# Altium PCB PCB2_Plata.PcbDoc
Units mm, origin at the board's own origin, x right, y up, seen from the top; angles counter-clockwise.
Board outline 55 x 30 mm, 2 copper layers (Top Layer, Bottom Layer), stack 1.57 mm thick; 46 components, 37 nets, 186 pads, 88 vias.
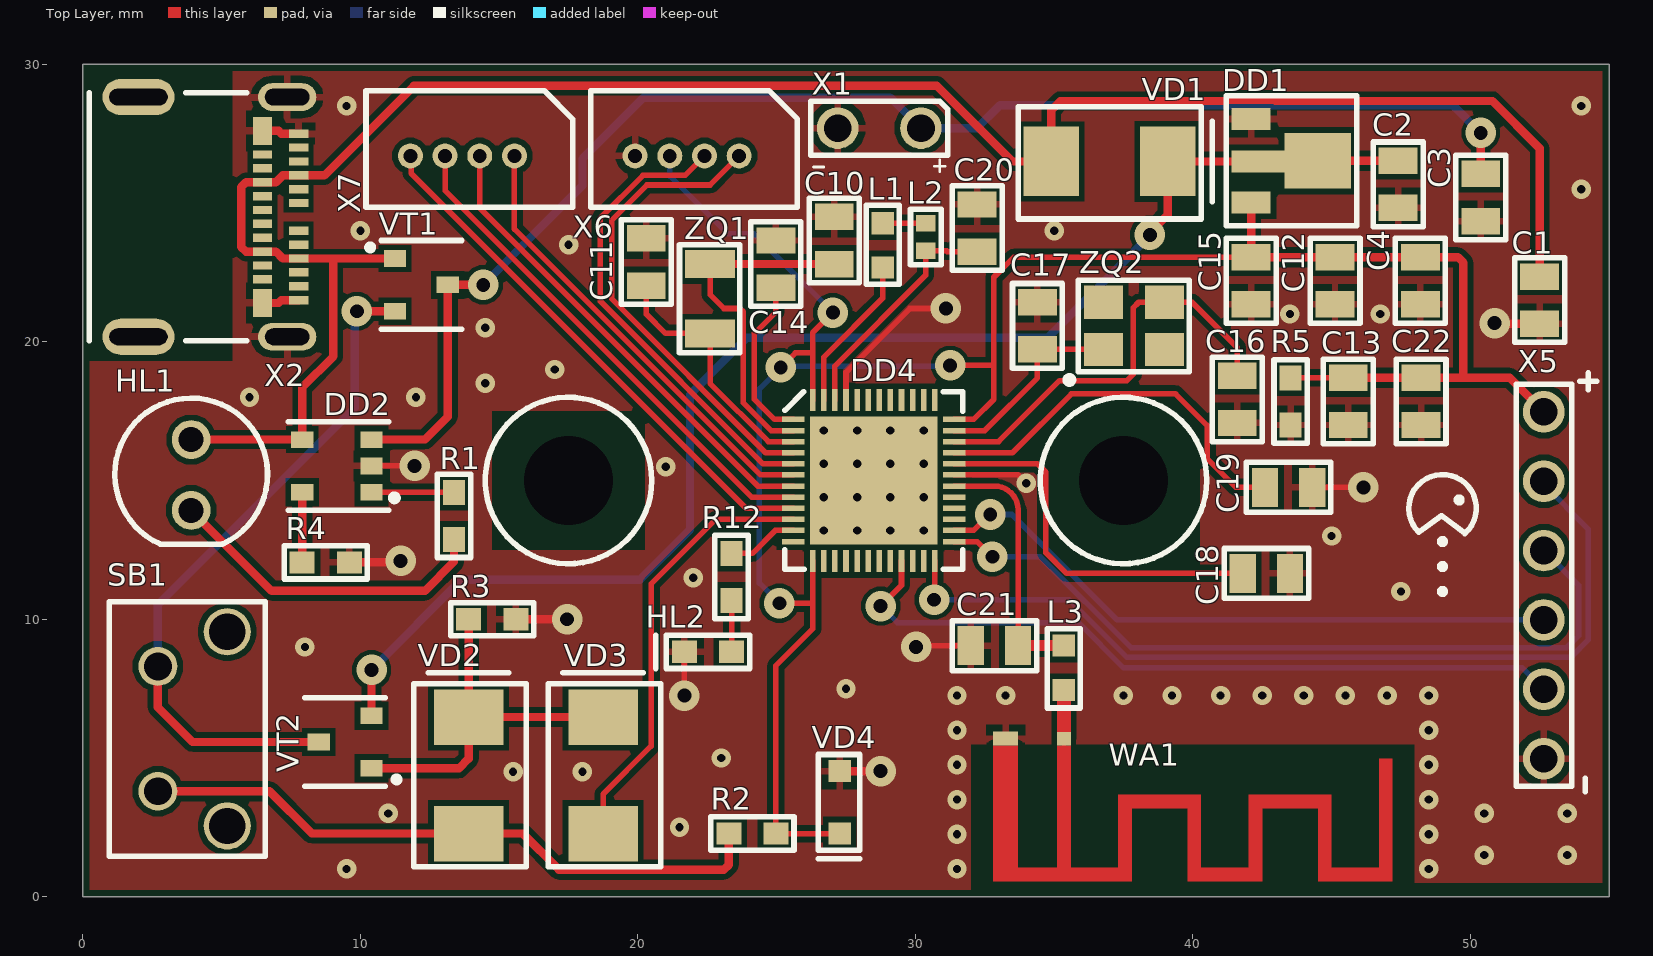
[diagram p0: Top Layer view]
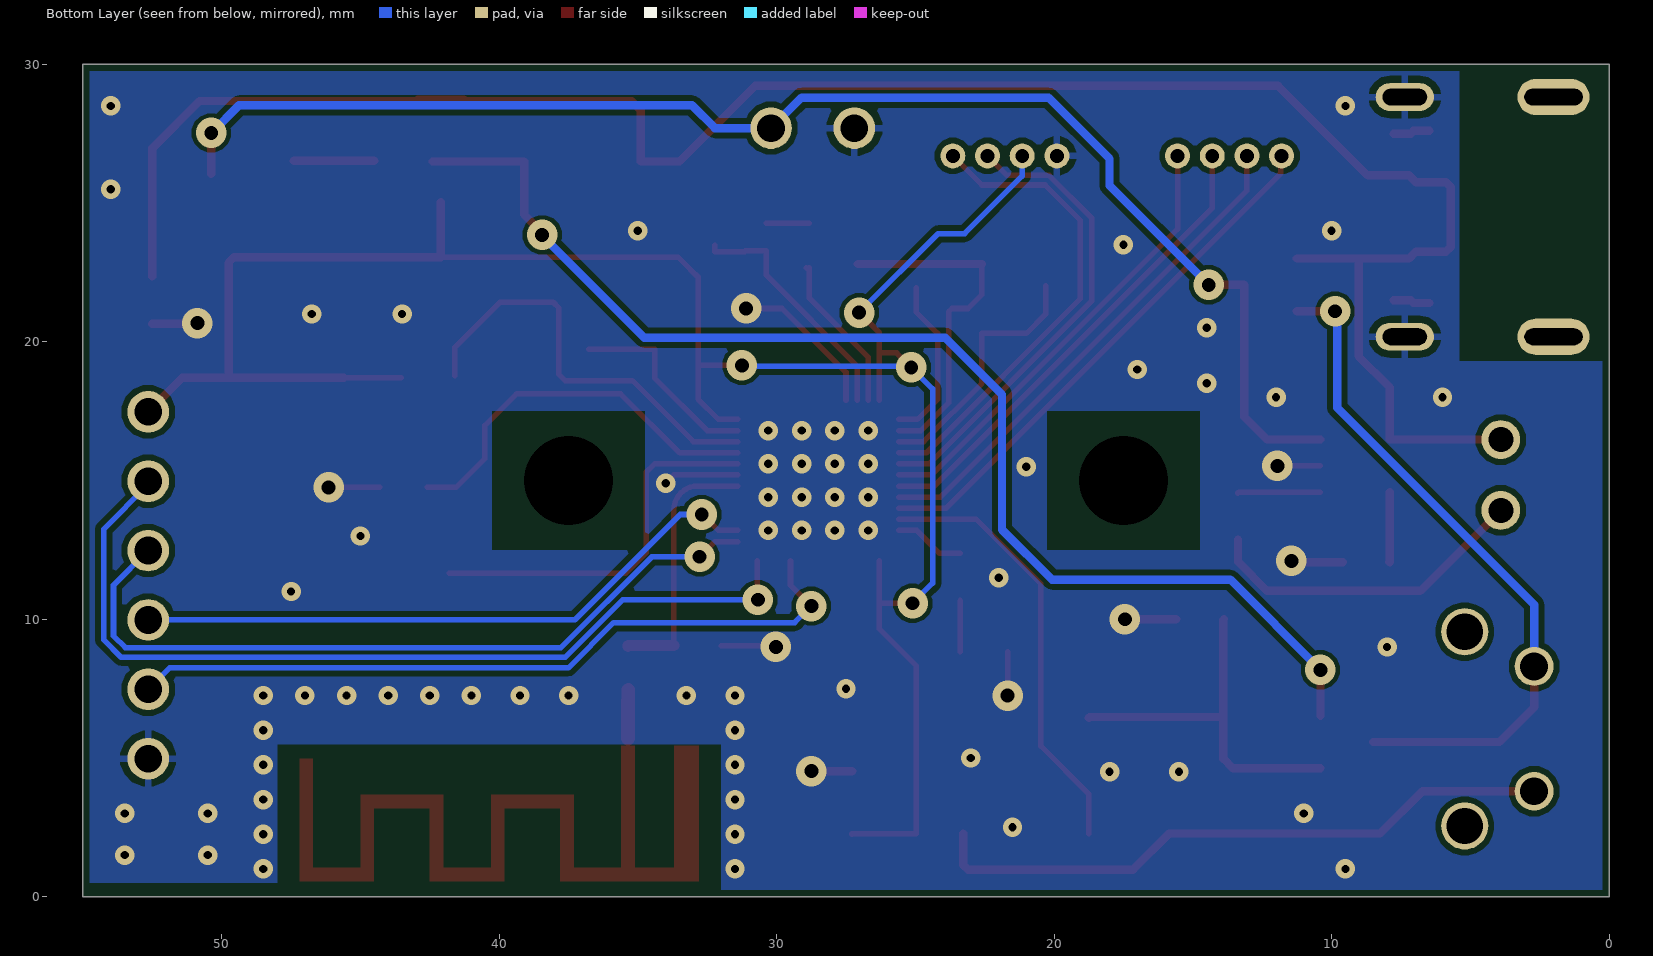
[diagram p1: Bottom Layer view, seen from below]
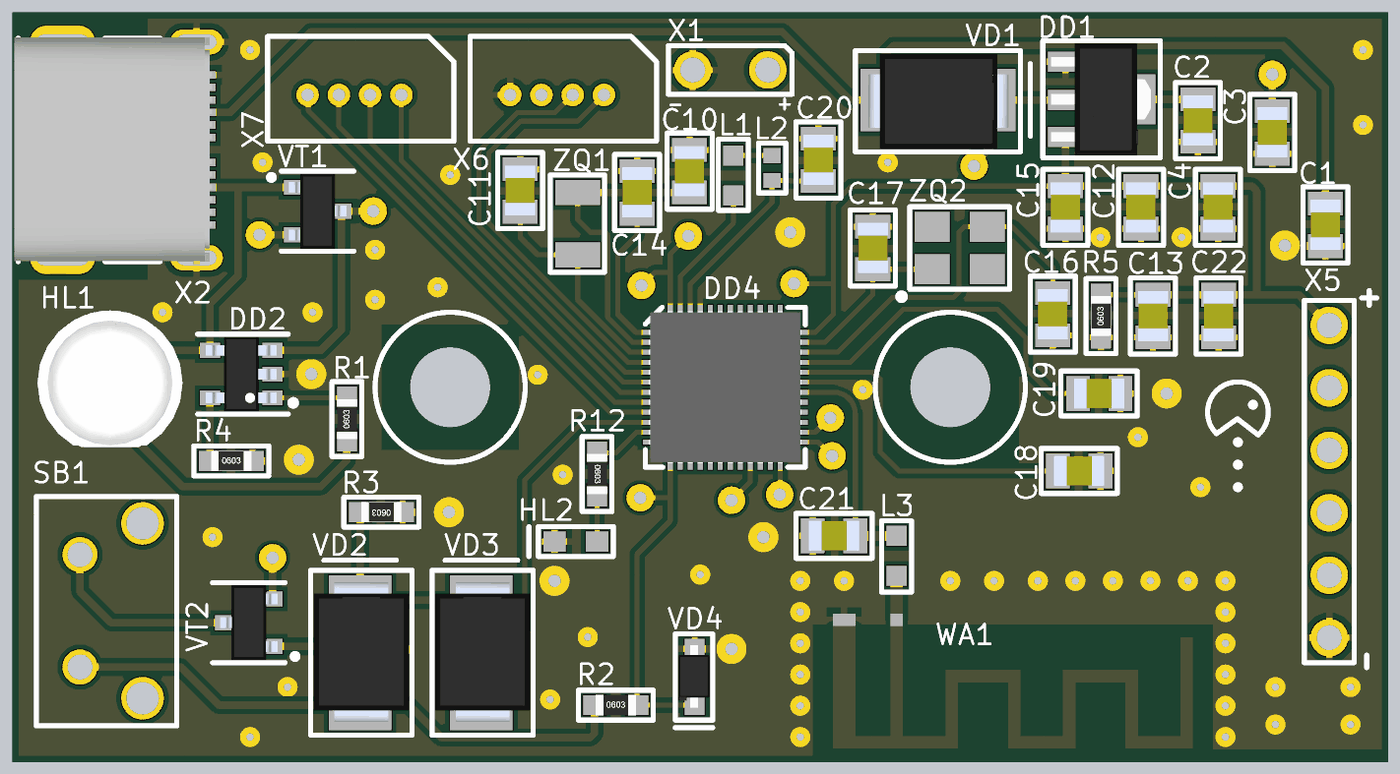
[diagram p2: 3D render of the assembled board from above, using the file's embedded part models]

## Layer stack, top to bottom
Top Solder: solder mask 0.01, Solder Resist, Dk 3.5
Top Layer: signal copper 0.035
Dielectric 1: dielectric 1.5, FR-4, Dk 4.8
Bottom Layer: signal copper 0.035
Bottom Solder: solder mask 0.01, Solder Resist, Dk 3.5

## Board outline
0,0 0,30 55,30 55,0

## Design rules (kind name [scope] priority, off if disabled: settings)
AcuteAngle [All] p1: minimum=6.00000000000000E+0001 checktracksonly=FALSE
Clearance Clearance_KeepOutLayer [OnLayer('Keep-Out Layer')] p1: gap=0.5 ignorepadtopadclearanceinfootprint=FALSE
Clearance [All] p2: gap=0.15 ignorepadtopadclearanceinfootprint=FALSE except(0.2: Track-Fill Track-Poly Track-Region SMDPad-Fill SMDPad-Poly SMDPad-Region THPad-Fill THPad-Poly THPad-Region Fill-Fill Fill-Poly Fill-Region Poly-Poly Poly-Region Region-Region)
ComponentClearance [All] p1: gap=0.2 collisioncheckmode=3 verticalgap=0.2 showdistances=FALSE
HoleSize [All] p1: absolutevalues=TRUE maxlimit=3.2 minlimit=0.3 maxpercent=80.000 minpercent=20.000
HoleToHoleClearance [All] p1: gap=0.2 allowstackedmicrovias=TRUE
MinimumAnnularRing [All] p1: minimumring=0.2
MinimumSolderMaskSliver [All] p1: minsoldermaskwidth=0.09
PolygonConnect PolygonConnect_Via [IsVia] p1: connectstyle=Direct reliefconductorwidth=0.254 reliefentries=4 polygonreliefangle="90 Angle" airgapwidth=0.254
PolygonConnect [All] p2: connectstyle=Relief reliefconductorwidth=0.25 reliefentries=4 polygonreliefangle="90 Angle" airgapwidth=0.25
RoutingVias [All] p1: holewidth=0.4 width=0.9 viastyle="Through Hole" minholewidth=0.3 minwidth=0.7 maxholewidth=0.5 maxwidth=1.1
SMDEntry [All] p1: side=TRUE corner=TRUE anyangle=FALSE
SMDNeckDown [All] p1: percent=100.000
SMDToCorner [All] p1: distance=0
SMDToPlane [All] p1: distance=0
SilkToSilkClearance [All] p1: silktosilkclearance=0
SilkToSolderMaskClearance [IsPad] p1: minsilkscreentomaskgap=0 clearancetoexposedcopper=FALSE
SolderMaskExpansion [All] p1: expansion=0.05 istentingtop=FALSE
Width [All] p1: maxlimit=5 minlimit=0.15 preferedwidth=0.25
24 further rules are at their usual default settings.

## Classes and differential pairs
component class Sheet3_mk: C10 C11 C12 C13 C14 C15 C16 C17 C18 C19 C20 C21 C22 DD4 HL2 L1 L2 L3 R12 WA1 X5 X6 X7 ZQ1 ZQ2
component class Sheet1: C1 C2 C3 C4 DD1 DD2 HL1 R1 R2 R3 R4 R5 SB1 VD1 VD2 VD3 VD4 VT1 VT2 X1 X2

## Components (designator, comment, footprint, x,y, rotation, side; value= is the part's Value field where it differs from the comment)
C1 "4.7 мкФ" CAP_0805 52.5,21.5 r270 top
C2 "1 мкФ" CAP_0805 47.4,25.675 r270 top
C3 "4.7 мкФ" CAP_0805 50.375,25.2 r90 top
C4 "1 мкФ" CAP_0805 48.2,22.2 r270 top
C10 "12 пФ" CAP_0805 27.075,23.65 r270 top
C11 "12 пФ" CAP_0805 20.3,22.875 r270 top
C12 "100 нФ" CAP_0805 45.125,22.2 r270 top
C13 "100 нФ" CAP_0805 45.6,17.85 r90 top
C14 "100 нФ" CAP_0805 24.975,22.8 r270 top
C15 "4.7 мкФ" CAP_0805 42.1,22.2 r270 top
C16 "12 пФ" CAP_0805 41.6,17.925 r270 top
C17 "12 пФ" CAP_0805 34.4,20.575 r90 top
C18 "100 пФ" CAP_0805 42.65,11.65 r0 top
C19 "100 пФ" CAP_0805 43.45,14.75 r0 top
C20 "1 мкФ" CAP_0805 32.225,24.1 r90 top
C21 "0.8 пФ" CAP_0805 32.85,9.05 r180 top
C22 "100 нФ" CAP_0805 48.225,17.85 r90 top
DD1 "XC6206P332RP" SOT-89 43.3,26.525 r270 top
DD2 "MCP73831T-2ATI/OT" SOT-23-5 10.4,14.575 r90 top
DD4 "nRF52832-QFAA" QFN48_6X6 28.5,15 r0 top
HL1 "L-57EGW" LED 3.9,15.2 r180 top
HL2 "TO-1608BC-PG" LED_0603 22.525,8.825 r180 top
L1 "10 мкГн" INDICT_0603 28.825,23.425 r90 top
L2 "15 нГн" INDICT_0402 30.375,23.775 r270 top
L3 "3.9 нГн" INDICT_0603 35.35,8.3 r270 top
R1 "470 Ом" RES_0603 13.375,13.725 r90 top
R2 "100 кОм" RES_0603 24.125,2.275 r0 top
R3 "100 кОм" RES_0603 14.75,10 r180 top
R4 "2 кОм" RES_0603 8.75,12.05 r0 top
R5 "1 МОм" RES_0603 43.525,17.85 r90 top
R12 "1 кОм" RES_0603 23.375,11.525 r270 top
SB1 "L-KLS7-TS6606" Button 3.95,6.05 r270 top
VD1 "10BQ100" SMB(DIODE) 37,26.5 r0 top
VD2 "10BQ100" SMB(DIODE) 13.9,4.375 r90 top
VD3 "10BQ100" SMB(DIODE) 18.75,4.375 r90 top
VD4 "MM3Z3V3B" SOD-323F 27.275,3.4 r90 top
VT1 "AO3401A" SOT-23-3 12.2,22.05 r270 top
VT2 "AO3400A" SOT-23-3 9.45,5.575 r90 top
WA1 "AN043" "BLE_50_Ohm_2400 MHz" 35.325,5.6 r90 top
X1 "LP803048" Raziem2_3mm 30.2,27.7 r180 top
X2 "105450-0101" USB-C 4,24.5 r270 top
X5 "JTAG" RAZIEM_6_2.54mm 52.65,17.475 r270 top
X6 "SCT1251WV-4P" Raziem4(1)_1.25mm 22.4,26.7 r180 top
X7 "SCT1251WV-4P" Raziem4(1)_1.25mm 14.3,26.7 r180 top
ZQ1 "32.768 кГц" QUARTZ(32.768) 22.6,20.3 r90 top
ZQ2 "32 МГц" QUARTZ(32) 37.875,20.575 r0 top

## Footprints (in the part's own frame and the unit in brackets; to place one, negate y for a bottom-side part, rotate by r counter-clockwise, add the part's x,y. Pads: shape width x height; smd on the part's side, far side on the other; paste and mask are expansions set on the pad)
"BLE_50_Ohm_2400 MHz" [mm]
  rect 0.5x0.5 smd mask+0.05: 1(0.094,-0.028)
  rect 0.5x0.9 smd paste+0 mask+0.05: 2(0.096,2.072)
  Top Layer region: -5.056,1.622 -0.148,1.622 -0.148,2.522 -5.056,2.522
  Top Layer region: -5.056,-2.477 -4.556,-2.477 -4.556,2.523 -5.056,2.523
  Top Layer region: -5.056,-2.477 -1.916,-2.477 -1.916,-1.977 -5.056,-1.977
  Top Layer region: -4.756,-0.278 -0.152,-0.278 -0.152,0.222 -4.756,0.222
  Top Layer region: -2.416,-4.539 -1.916,-4.539 -1.916,-2.163 -2.416,-2.163
  Top Layer region: -4.662,-4.978 -1.916,-4.978 -1.916,-4.478 -4.662,-4.478
  Top Layer region: -5.056,-7.177 -4.556,-7.177 -4.556,-4.477 -5.056,-4.477
  Top Layer region: -4.686,-7.177 -1.916,-7.177 -1.916,-6.677 -4.686,-6.677
  Top Layer region: -2.416,-9.303 -1.916,-9.303 -1.916,-7.145 -2.416,-7.145
  Top Layer region: -4.634,-9.678 -1.916,-9.678 -1.916,-9.178 -4.634,-9.178
  Top Layer region: -5.057,-11.878 -4.557,-11.878 -4.557,-9.178 -5.057,-9.178
  Top Layer region: -4.877,-11.878 -0.616,-11.878 -0.616,-11.378 -4.877,-11.378
Button [mm]
  round 1.7 hole 1.3: 0(-3.5,1.25) 0(3.5,1.25)
  round 1.4 hole 1: 1(-2.25,-1.25) 2(2.25,-1.25)
  silkscreen extent -4.57,-3 4.6,2.63, body extent -3.75,-2.88 3.75,2.54, height 8.1
CAP_0805 [mm]
  rect 0.95x1.4 smd: 1(-0.85,0) 2(0.85,0)
  silkscreen extent -1.53,-0.9 1.53,0.9, body extent -1,-0.6 1,0.6, height 0.9
INDICT_0402 [mm]
  rect 0.6x0.7 smd: 1(-0.5,0) 2(0.5,0)
  silkscreen extent -1,-0.55 1,0.55, body extent -0.5,-0.25 0.5,0.25, height 0.5
INDICT_0603 [mm]
  rect 0.8x0.8 smd: 1(-0.75,0) 2(0.85,0)
  silkscreen extent -1.35,-0.6 1.5,0.6, body extent -0.7,-0.35 0.77,0.33, height 0.6
LED [mm]
  round 1.4 hole 0.9: A(0,-1.275) K(0,1.275)
  silkscreen extent -2.75,-2.77 2.75,2.5, body extent -2.9,-2.86 2.9,2.53, height 13.1
LED_0603 [mm]
  rect 0.9x0.8 smd: A(-0.85,0) K(0.85,0)
  silkscreen extent -1.5,-0.6 1.88,0.6, body extent -0.8,-0.41 0.8,0.41, height 0.4
QFN48_6X6 [mm]
  rect 4.6x4.6 smd: 0(0,0)
  rect 0.8x0.2 smd: 1(-2.9,2.2) 2(-2.9,1.8) 3(-2.9,1.4) 4(-2.9,1) 5(-2.9,0.6) 6(-2.9,0.2) 7(-2.9,-0.2) 8(-2.9,-0.6) 9(-2.9,-1) 10(-2.9,-1.4) 11(-2.9,-1.8) 12(-2.9,-2.2) 25(2.9,-2.2) 27(2.9,-1.4) 28(2.9,-1) 29(2.9,-0.6) 30(2.9,-0.2) 31(2.9,0.2) 32(2.9,0.6) 33(2.9,1) 34(2.9,1.4) 35(2.9,1.8) 36(2.9,2.2)
  rect 0.2x0.8 smd: 13(-2.2,-2.9) 14(-1.8,-2.9) 15(-1.4,-2.9) 16(-1,-2.9) 17(-0.6,-2.9) 18(-0.2,-2.9) 19(0.2,-2.9) 20(0.6,-2.9) 21(1,-2.9) 22(1.4,-2.9) 23(1.8,-2.9) 24(2.2,-2.9) 37(2.2,2.9) 38(1.8,2.9) 39(1.4,2.9) 40(1,2.9) 41(0.6,2.9) 42(0.2,2.9) 43(-0.2,2.9) 44(-0.6,2.9) 45(-1,2.9) 46(-1.4,2.9) 47(-1.8,2.9) 48(-2.2,2.9)
  rect 0.8x0.2 smd paste+0: 26(2.9,-1.8)
  silkscreen extent -3.2,-3.2 3.2,3.2, body extent -3.05,-3.05 3.05,3.05, height 0.9
QUARTZ(32) [mm]
  rect 1.4x1.2 smd: 1(-1.1,-0.85) 2(1.1,0.85) 3(1.1,-0.85) 4(-1.1,0.85)
  silkscreen extent -2.45,-2.07 2,1.65, body extent -1.67,-1.34 1.68,1.34, height 0.8
QUARTZ(32.768) [mm]
  rect 1x1.8 smd: 1(0,0) 2(2.5,0)
  silkscreen extent -0.7,-1.07 3.2,1.1, body extent -0.4,-0.85 2.93,0.82, height 1
Raziem2_3mm [mm]
  round 1.5 hole 1: 1(0,0) 2(3,0)
  silkscreen extent -0.97,-0.97 3.98,1.58
Raziem4(1)_1.25mm [mm]
  round 0.9 hole 0.5: 1(-1.25,0) 2(0,0) 3(1.25,0) 4(2.5,0)
  silkscreen extent -3.35,-2.35 4.1,1.85, body extent -2.75,-1.75 4,1.75, height 4.7
RAZIEM_6_2.54mm [mm]
  round 1.5 hole 1: 1(0,0) 2(2.5,0) 3(5,0) 4(7.5,0) 5(10,0) 6(12.5,0)
  silkscreen extent -1.4,-1 13.7,1.9
RES_0603 [mm]
  rect 0.9x0.8 smd: 1(-0.85,0) 2(0.85,0)
  silkscreen extent -1.5,-0.6 1.5,0.6, body extent -0.8,-0.41 0.8,0.41, height 0.45
SMB(DIODE) [mm]
  rect 2x2.5 smd: A(-2.1,0) K(2.1,0)
  silkscreen extent -3.3,-2.07 3.7,1.97, body extent -2.78,-1.95 2.82,1.85, height 2.4
SOD-323F [mm]
  rect 0.8x0.8 smd: A(1.125,0) K(-1.125,0)
  silkscreen extent -2.02,-0.72 1.73,0.77, body extent -1.22,-0.6 1.28,0.65, height 0.72
SOT-23-3 [mm]
  rect 0.6x0.8 smd: DRAIN(0,0.95) GATE(-0.95,-0.95) SOURCE(0.95,-0.95)
  silkscreen extent -1.6,-1.94 1.6,1.45, body extent -1.5,-1.15 1.5,1.15, height 1.1
SOT-23-5 [mm]
  rect 0.6x0.8 smd: 1(0,0) 2(0.95,0) 3(1.9,0) 4(1.9,2.5) 5(0,2.5)
  silkscreen extent -0.65,-0.93 2.55,3, body extent -0.55,-0.17 2.45,2.67, height 1.1
SOT-89 [mm]
  rect 0.8x1.4 smd: 1(-1.5,-1.2) 3(1.5,-1.2)
  rect 2x2.4 smd: 2(0,1.2)
  rect 0.8x2 smd: 2(0.025,-0.9)
  silkscreen extent -2.35,-2.1 2.35,2.6, body extent -2.25,-1.77 2.25,2.23, height 1.53
USB-C [mm]
  rect 0.3x0.7 smd: A1(-3,3.77) A2(-2.5,3.77) A3(-2,3.77) A4(-1.5,3.77) A5(-1,3.77) A6(-0.5,3.77) A7(0.5,3.77) A8(1,3.77) A9(1.5,3.77) A10(2,3.77) A11(2.5,3.77) A12(3,3.77) B2(2.25,2.47) B3(1.75,2.47) B4(1.25,2.47) B5(0.75,2.47) B6(0.25,2.47) B7(-0.25,2.47) B8(-0.75,2.47) B9(-1.25,2.47) B10(-1.75,2.47) B11(-2.25,2.47)
  rect 1x0.7 smd: B1(3.1,2.47) B12(-3.1,2.47)
  oval 1x2.1 hole 0.6 slot 1.6 at 90 deg: SH(-4.32,3.36) SH(4.32,3.36)
  oval 1.3x2.6 hole 0.6 slot 2.1 at 90 deg: SH(-4.32,-2) SH(4.32,-2)
  silkscreen extent -4.47,-3.77 4.47,1.9, body extent -4.5,-3.93 4.45,3.98, height 3.18

## Part data
C1 C2 C3 C4 C10 C11 C12 C13 C14 C15 C16 C17 C18 C19 C20 C21 C22: library part Condensator
DD1: library part Stability_power, Name=XC6206P332RP
DD2: library part Control_batery, Name=MCP73831T-2ATI/OT
DD4: library part Micro_Proc(nrf52832), Name=nRF52832-QFAA
HL1 HL2: library part Svetodiode
  HL1: Color=L-57EGW, Name=L-57EGW
  HL2: Color=TO-1608BC-PG
L1 L2 L3: library part Induktivnost
R1 R2 R3 R4 R5 R12: library part Rezistor
SB1: library part Button, Name=L-KLS7-TS6606
VD1 VD2 VD3: library part Diode_SHOTKI, Name=10BQ100
VD4: library part Stabilitron, Name=MM3Z3V3B
VT1: library part Polevoy_transistor_P_tip, Name=AO3401A
VT2: library part Polevoy_transistor_N_tip, Name=AO3400A
WA1: library part Antena
X1: library part Raziem_2KONTKTA, Name=LP803048
X2: library part Raziem_USB-C, Name=105450-0101
X5: library part Raziem_6KONTKT, Name=JTAG
X6: library part Raziem_4KONTKTA_1, Name=SCT1251WV-4P
X7: library part Raziem_4KONTKTA, Name=SCT1251WV-4P
ZQ1 ZQ2: library part Kvarc_rezonator
  ZQ1: Name="32.768 кГц"
  ZQ2: Name="32 МГц"

## Free pads (board coordinates)
  round 0 hole 3.2 unplated: 0(17.5,15) 1(37.5,15)

## Via types
v1: diameter 0.7, hole 0.3, Top Layer to Bottom Layer, 66 vias
v2: diameter 1.1, hole 0.5, Top Layer to Bottom Layer, 22 vias

## Nets (pads, with @x,y where several pads share a name; then routed paths per layer and width w, separated by ;. In a path a pad name is that pad's centre, name@x,y a point inside that pad or via, vN(x,y) a via of type N, cw(c..) or ccw(c..) an arc to the next point about the centre after c; other vN are vias at no path point)
GND: C1.2 C2.2 C3.1 C4.2 C10.1 C11.1 C12.2 C13.1 C14.1 C15.2 C16.2 C17.2 C18.2 C19.2 C20.2 C21.2 C22.1 DD1.1 DD2.2 DD4.0 DD4.31 DD4.45 HL2.K R3.1 R4.2 R5.1 VD4.A WA1.2 X1.2 X2.A1 X2.A12 X2.B1 X2.B12 X2.SH@7.36,20.18 X2.SH@7.36,28.82 X5.6 X6.4 | length 24.7
  Top Layer w0.2: DD2.2 v2(11.95,15.525) ; v2(21.675,7.25) cw(c21.675,7.275) 21.65,7.275 21.65,7.475 ccw(c21.65,7.5) 21.675,7.5 HL2.K ; DD4.45 27.5,18.9 29.8,21.2 v2(31.1,21.2) ; v2(30.025,9) 30.075,9.05 C21.2 ; DD4.31 33.7,15.2 v1@33.9,15 ; C19.2 v2(46.15,14.75)
  Top Layer w0.3: X2.B1 7.05,21.4 7.15,21.5 X2.A12 ; X2.B12 7.05,27.6 7.15,27.5 7.42,27.5 X2.A1 ; R4.2 11.4,12.05 v2(11.45,12.1) ; R3.1 v2(17.45,10) ; VD4.A 27.675,4.525 v2(28.75,4.525) ; v2(50.875,20.675) 50.9,20.65 C1.2
  Top Layer w0.6: v1(33.25,7.25) v1@33.253,7.247
  other v1: 9.5,1 31.5,1 48.5,1 50.5,1.5 53.5,1.5 31.5,2.25 48.5,2.25 21.5,2.5 11,3 50.5,3 53.5,3 31.5,3.5 48.5,3.5 15.5,4.5 18,4.5 31.5,4.75 48.5,4.75 23,5 31.5,6 48.5,6 31.5,7.25 37.5,7.25 39.25,7.25 41,7.25 42.5,7.25 44,7.25 45.5,7.25 47,7.25 48.5,7.25 27.5,7.5 8,9 47.5,11 22,11.5 45,13 26.7,13.2 27.9,13.2 29.1,13.2 30.3,13.2 26.7,14.4 27.9,14.4 29.1,14.4 30.3,14.4 34,14.9 21,15.5 26.7,15.6 27.9,15.6 29.1,15.6 30.3,15.6 26.7,16.8 27.9,16.8 29.1,16.8 30.3,16.8 6,18 12,18 14.5,18.5 17,19 14.5,20.5 43.5,21 46.75,21 17.5,23.5 10,24 35,24 54,25.5 9.5,28.5 54,28.5
NetC1_1: C1.1 DD2.4 HL1.A VD1.A VT1.GATE X2.A4 X2.A9 X2.B4 X2.B9 | length 75.7
  Top Layer w0.3: HL1.A DD2.4 7.9,18.35 9.025,19.475 9.025,23 ; VT1.GATE 9.025,23 ; C1.1 52.5,26.975 50.8,28.675 42.974,28.675 42.924,28.725 41.276,28.725 41.226,28.675 35.225,28.675 34.9,28.35 VD1.A 33.5,26.5 30.775,29.225 11.925,29.225 8.7,26 X2.A4 7.2,26 6.95,25.75 X2.B9 5.879,25.75 5.703,25.574 5.703,23.423 5.876,23.25 X2.B4 6.95,23.25 7.2,23 X2.A9 9.025,23
NetC2_1: C2.1 DD1.2 VD1.K VT2.SOURCE | length 48.2
  Top Layer w0.3: VT2.SOURCE v2(10.4,8.175) ; v2(38.45,23.85) 38.45,23.94 39.1,24.59 VD1.K DD1.2@42.4,26.5 ; DD1.2@44.5,26.525 46.7,26.525 C2.1
  Bottom Layer w0.3: v2(10.4,8.175) 13.65,11.425 20.075,11.425 21.875,13.225 21.875,18.1 23.925,20.15 34.774,20.15 38.45,23.826 v2(38.45,23.85)
NetC3_2: C3.2 DD2.3 VT1.DRAIN X1.1 | length 51.1
  Top Layer w0.3: DD2.3 12.325,16.475 13.15,17.3 VT1.DRAIN v2(14.425,22.05) ; C3.2 v2(50.375,27.525)
  Bottom Layer w0.3: v2(14.425,22.05) 18,25.625 18,26.6 20.2,28.8 29.1,28.8 X1.1 32.225,27.7 33.05,28.525 49.375,28.525 v2(50.375,27.525)
NetC4_1: C4.1 C12.1 C13.2 C15.1 C22.2 DD1.3 DD4.13 DD4.36 DD4.48 R2.2 R5.2 VD4.K X5.1 X6.3 | length 83.4
  Top Layer w0.2: v2(25.1,10.575) 26.3,10.575 ; v2(25.15,19.075) 25.675,19.6 26.3,19.6 ; DD4.13 26.3,10.575 ; DD4.48 26.3,19.6 ; v2(27.025,21.05) 26.3,20.325 26.3,19.6 ; VD4.K@27.3,2.25 VD4.K R2.2 24.975,8.325 26.3,9.65 26.3,10.575 ; v2(31.25,19.15) 32.825,19.15 ; DD4.36 32.1,17.2 32.825,17.925 32.825,19.15 ; C15.1 33.55,23.05 33.175,22.675 33.175,22.671 33.029,22.525 33.025,22.525 32.825,22.325 32.825,19.15 ; R5.2 C13.2
  Top Layer w0.3: DD1.3 C15.1 C12.1 C4.1 49.55,23.05 49.75,22.85 49.75,18.7 ; C13.2 C22.2 49.75,18.7 ; X5.1 51.425,18.7 49.75,18.7
  Bottom Layer w0.2: X6.3 21.15,25.975 23.225,23.9 24.175,23.9 v2(27.025,21.05) ; v2(25.1,10.575) 24.375,11.3 24.375,18.3 v2(25.15,19.075) 25.187,19.112 31.213,19.112 v2(31.25,19.15)
NetC6_1: 
NetC10_2: C10.2 DD4.2 ZQ1.2 | length 12.5
  Top Layer w0.2: ZQ1.2 22.6,21.7 23.1,21.2 23.683,21.2 23.8,21.083 23.8,17.8 24.8,16.8 DD4.2
  Top Layer w0.3: ZQ1.2 C10.2
NetC11_2: C11.2 DD4.3 ZQ1.1 | length 9.3
  Top Layer w0.2: C11.2 20.3,21 21,20.3 ZQ1.1 22.6,18.5 24.7,16.4 DD4.3
NetC14_2: C14.2 DD4.1 | length 6
  Top Layer w0.2: C14.2 24.975,21.075 24.2,20.3 24.2,17.925 24.925,17.2 DD4.1
NetC16_1: C16.1 DD4.34 ZQ2.2 | length 15.4
  Top Layer w0.2: DD4.34 33,16.4 35.2,18.6 37.625,18.6 37.85,18.825 37.85,21.225 38.05,21.425 ZQ2.2 39.975,21.425 41.6,19.8 C16.1
NetC17_1: C17.1 DD4.35 ZQ2.1 | length 7.2
  Top Layer w0.2: DD4.35 32.5,16.8 34.4,18.7 C17.1 36.075,19.725 ZQ2.1
NetC18_1: C18.1 DD4.32 | length 13.7
  Top Layer w0.2: DD4.32 34.4,15.6 34.7,15.3 34.7,12.4 35.45,11.65 C18.1
NetC19_1: C19.1 DD4.33 | length 14.2
  Top Layer w0.2: DD4.33 33.5,16 35.625,18.125 39.375,18.125 40.512,16.988 40.512,15.788 41.55,14.75 C19.1
NetC20_1: C20.1 DD4.46 L2.2 | length 8.8
  Top Layer w0.2: DD4.46 27.1,19.125 30.375,22.4 L2.2@30.375,23.25 ; L2.2 31.125,23.275 31.15,23.25 C20.1 C20.1@32.225,23.475
NetC21_1: C21.1 DD4.30 L3.1 | length 9.4
  Top Layer w0.2: DD4.30 32.85,14.8 cw(c32.85,13.95) 33.7,13.95 C21.1
  Top Layer w0.4: C21.1 34.95,9.05 L3.1 ; L3.1@35.325,9.05 cw(c35.325,9.025) L3.1@35.35,9.025
NetDD2_1: DD2.1 R1.2 | length 3
  Top Layer w0.2: DD2.1 13.35,14.575 R1.2@13.375,14.55
NetDD2_5: DD2.5 R4.1 | length 2.6
  Top Layer w0.3: DD2.5 7.9,14.275 R4.1 R4.1@7.925,12.075
NetDD4_4: DD4.4 X6.1 | length 17.2
  Top Layer w0.2: X6.1 22.6,25.65 20.325,25.65 19.05,24.375 19.05,21.555 24.605,16 DD4.4
NetDD4_5: DD4.5 X6.2 | length 17.1
  Top Layer w0.2: X6.2 21.7,26 20.18,26 18.65,24.47 18.65,21.46 24.51,15.6 DD4.5
NetDD4_6: DD4.6 X7.1 | length 16.4
  Top Layer w0.2: X7.1 15.55,24.065 24.415,15.2 DD4.6
NetDD4_7: DD4.7 X7.2 | length 17.3
  Top Layer w0.2: X7.2 14.3,24.82 24.32,14.8 DD4.7
NetDD4_8: DD4.8 X7.3 | length 18.4
  Top Layer w0.2: X7.3 13.05,25.45 24.1,14.4 DD4.8
NetDD4_9: DD4.9 X7.4 | length 19.4
  Top Layer w0.2: X7.4 11.831,26.669 11.831,26.071 23.902,14 DD4.9
NetDD4_10: DD4.10 VD3.A | length 15.8
  Top Layer w0.2: VD3.A 18.75,3.7 20.475,5.425 20.475,11.271 22.804,13.6 DD4.10
NetDD4_11: DD4.11 R12.1 | length 2.6
  Top Layer w0.2: R12.1 24.125,12.375 24.95,13.2 DD4.11
NetDD4_21: DD4.21 X5.5 | length 27.1
  Top Layer w0.2: v2(28.75,10.475) 29.5,11.225 DD4.21
  Bottom Layer w0.2: v2(28.75,10.475) 28.757,10.475 29.355,9.878 35.878,9.878 37.505,8.25 51.875,8.25 X5.5
NetDD4_24: DD4.24 X5.2 | length 32.5
  Top Layer w0.2: v2(30.675,10.7) 30.7,10.725 DD4.24
  Bottom Layer w0.2: v2(30.675,10.7) 35.55,10.7 37.625,8.625 53.209,8.625 53.62,8.625 54.25,9.255 54.25,13.25 52.65,14.85 X5.2
NetDD4_25: DD4.25 X5.3 | length 27.9
  Top Layer w0.2: DD4.25 32.225,12.8 v2(32.775,12.25)
  Bottom Layer w0.2: v2(32.775,12.25) 34.5,12.25 37.775,8.975 53.475,8.975 53.9,9.4 53.9,11.225 X5.3
NetDD4_26: DD4.26 X5.4 | length 23.1
  Top Layer w0.2: DD4.26 32.1,13.2 32.675,13.775 v2(32.7,13.775)
  Bottom Layer w0.2: v2(32.7,13.775) 33.475,13.775 37.275,9.975 X5.4
NetDD4_47: DD4.47 L1.1 | length 5.7
  Top Layer w0.2: DD4.47 26.7,19.45 28.825,21.575 L1.1 ; L1.1@28.875,22.625 L1.1@28.925,22.675
NetHL1_K: HL1.K R1.1 | length 11.9
  Top Layer w0.3: HL1.K 6.8,11.025 12.325,11.025 13.375,12.075 R1.1
NetHL2_A: HL2.A R12.2 | length 1.9
  Top Layer w0.2: HL2.A 23.375,9.225 R12.2
NetL1_2: L1.2 L2.1 | length 1.6
  Top Layer w0.2: L1.2 30.025,24.275 L2.1
NetL3_2: L3.2 WA1.1 | length 1.8
  Top Layer w0.5: L3.2 35.35,7.05 35.353,7.047 WA1.1
NetR2_1: R2.1 SB1.2 VD2.A | length 22.9
  Top Layer w0.3: SB1.2 6.725,3.8 8.25,2.275 VD2.A 15.85,2.275 17.15,0.975 23.099,0.975 23.275,1.151 R2.1
NetR3_2: R3.2 VD2.K VD3.K VT2.GATE | length 13.5
  Top Layer w0.3: VT2.GATE 13.55,4.625 13.9,4.975 VD2.K ; R3.2@13.875,10 13.9,9.975 VD2.K ; VD3.K@18.75,6.45 18.725,6.475 VD2.K
NetSB1_1: SB1.1 VT1.SOURCE VT2.DRAIN | length 24.9
  Top Layer w0.3: SB1.1 2.7,6.825 3.95,5.575 VT2.DRAIN ; v2(9.875,21.1) VT1.SOURCE
  Bottom Layer w0.3: SB1.1 2.7,10.525 9.8,17.625 9.8,21.025 v2(9.875,21.1)
pads on no net: DD4.12 DD4.14 DD4.15 DD4.16 DD4.17 DD4.18 DD4.19 DD4.20 DD4.22 DD4.23 DD4.27 DD4.28 DD4.29 DD4.37 DD4.38 DD4.39 DD4.40 DD4.41 DD4.42 DD4.43 DD4.44 SB1.0 X2.A2 X2.A3 X2.A5 X2.A6 X2.A7 X2.A8 X2.A10 X2.A11 X2.B2 X2.B3 X2.B5 X2.B6 X2.B7 X2.B8 X2.B10 X2.B11 X2.SH@2,20.18 X2.SH@2,28.82 ZQ2.3 ZQ2.4

## Polygon pours and split planes (outlines as drawn)
GND on Bottom Layer "Bottom Layer_GND" (solid, remove dead copper, pour order 1): 0.25,29.75 54.75,29.75 54.75,0.5 48,0.5 48,5.5 32,5.5 32,0.25 0.25,0.25
GND on Top Layer "Top Layer-GND" (solid, remove dead copper, pour order 0): 0.25,29.75 54.75,29.75 54.75,0.5 48,0.5 48,5.5 32,5.5 32,0.25 0.25,0.25

## Other copper
Top Layer:
  pour cut-out: 0,30 5.4,30 5.4,19.3 0,19.3
  pour cut-out: 34.75,17.5 40.25,17.5 40.25,11.95 34.75,11.95
  pour cut-out: 14.75,17.5 20.25,17.5 20.25,12.5 14.75,12.5
Bottom Layer:
  pour cut-out: 0,30 5.4,30 5.4,19.3 0,19.3
  pour cut-out: 34.75,17.5 40.25,17.5 40.25,12.5 34.75,12.5
  pour cut-out: 14.75,17.5 20.25,17.5 20.25,12.5 14.75,12.5

## Silkscreen, mask and mechanical layers (free items; w line width, h text height)
Top Overlay:
  circle w0.2: c49,11 r0.1
  circle w0.2: c49,11.9 r0.1
  circle w0.2: c49,12.8 r0.1
  circle w0.2: c49.6,14.3 r0.1
  circle w0.2: c37.5,15 r3
  circle w0.2: c17.5,15 r3
  lines w0.2: 48.14,13.14 cw(c49,14) 49.808,13.091 48.977,13.738 48.14,13.14